# Altium PCB PCB1.PcbDoc
Units mil, origin at the board's own origin, x right, y up, seen from the top; angles counter-clockwise.
Board outline 2180 x 1597.53 mil, 2 copper layers (Top Layer, Bottom Layer); 11 components, 8 nets, 28 pads, 0 vias.
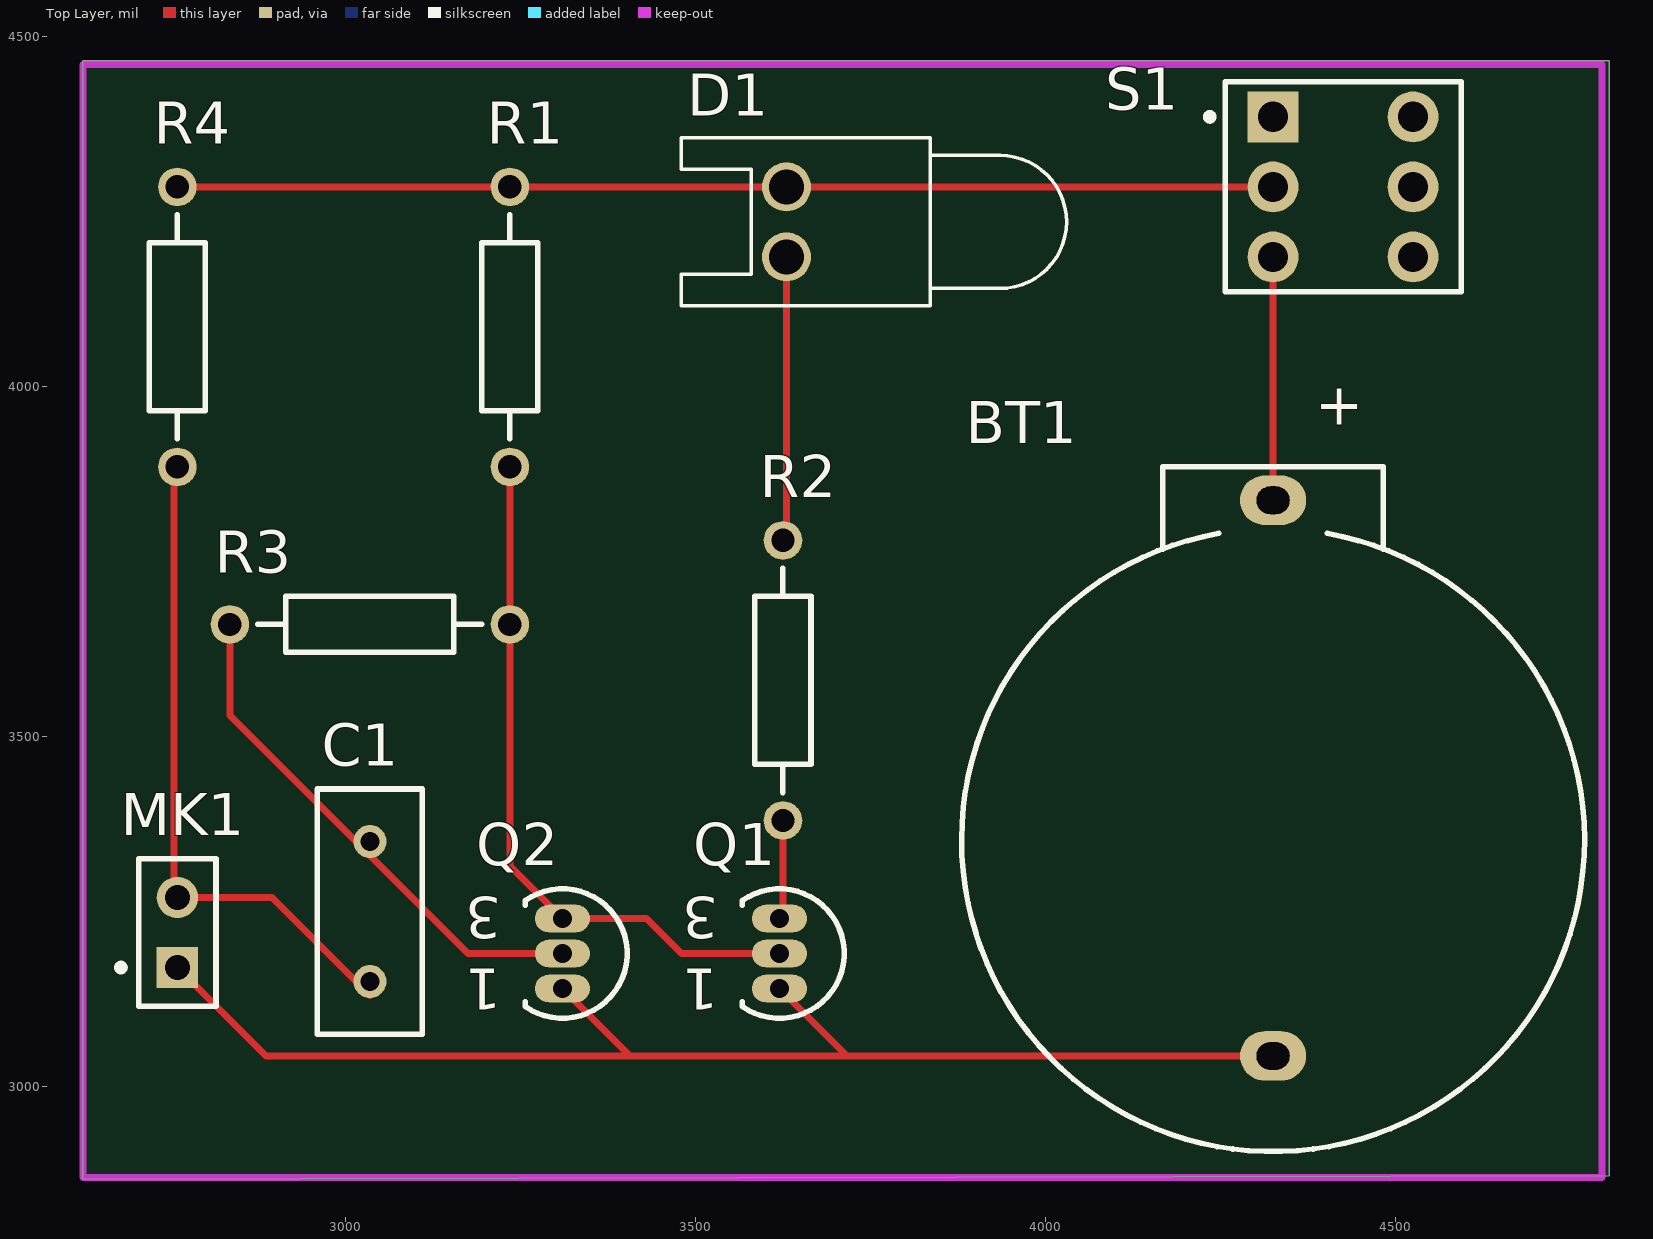
[diagram p0: Top Layer view]
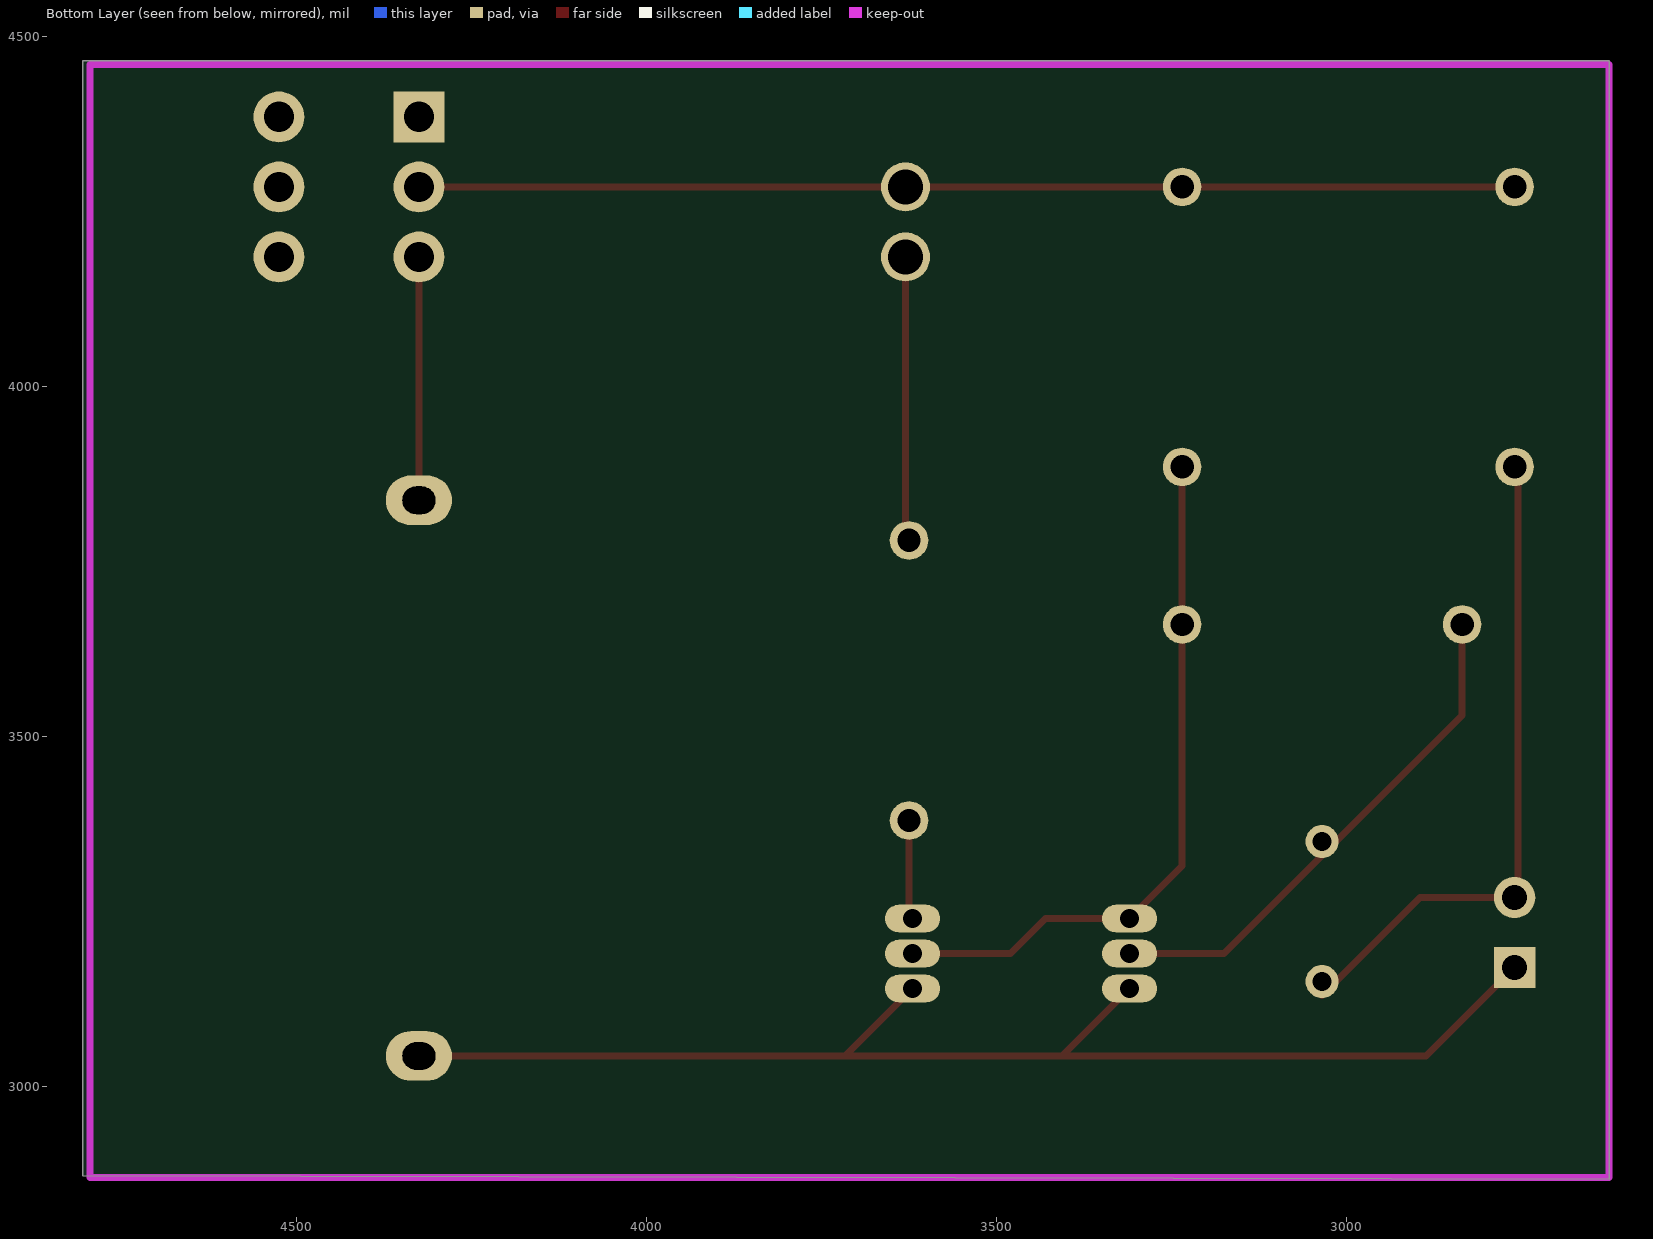
[diagram p1: Bottom Layer view, seen from below]

## Layer stack, top to bottom
Top Solder: solder mask 0.4, Solder Resist, Dk 3.5
Top Layer: signal copper 1.4
Dielectric 1: dielectric 12.6, FR-4, Dk 4.8
Bottom Layer: signal copper 1.4
Bottom Solder: solder mask 0.4, Solder Resist, Dk 3.5

## Board outline
4805,2872.51 4805,4465 2625,4465 2625,2867.47
cut-out: 2740,4725
cut-out: 2815,4825
cut-out: 4670,2615
cut-out: 4610,2550

## Design rules (kind name [scope] priority, off if disabled: settings)
Clearance [All] p1: gap=10 ignorepadtopadclearanceinfootprint=FALSE except(0: Arc-Hole Track-Hole SMDPad-Hole THPad-Hole Via-Hole Fill-Hole Poly-Hole Region-Hole Text-Hole)
PolygonConnect [All] p1: connectstyle=Relief reliefconductorwidth=10 reliefentries=4 polygonreliefangle="90 Angle" airgapwidth=10
RoutingVias [All] p1: holewidth=28 width=50 viastyle="Through Hole" minholewidth=28 minwidth=50 maxholewidth=28 maxwidth=50
SolderMaskExpansion [All] p1: expansion=4
Width [All] p1: maxlimit=10 minlimit=10 preferedwidth=10
30 further rules are at their usual default settings.

## Components (designator, comment, footprint, x,y, rotation, side; value= is the part's Value field where it differs from the comment)
BT1 "BAT3volt" BTH2032 4325,3350 r270 top
C1 "Cap" RAD-0.2 3035,3250 r90 top value=1uF
D1 "LED0" LED-0 3630,4235 r90 top
MK1 "Mic2" PIN2 2760,3170 r90 top
Q1 "8050" TO-92 3620,3190 r180 top
Q2 "8050" TO-92 3310,3190 r180 top
R1 "Res2" AXIAL-0.4 3235,4085 r90 top value=100k
R2 "Res2" AXIAL-0.4 3625,3580 r90 top value=100
R3 "Res2" AXIAL-0.4 3035,3660 r180 top value=100k
R4 "Res2" AXIAL-0.4 2760,4085 r90 top value=4.7k
S1 "SW-DPDT" DPDT-6 4425,4285 r0 top

## Footprints (in the part's own frame and the unit in brackets; to place one, negate y for a bottom-side part, rotate by r counter-clockwise, add the part's x,y. Pads: shape width x height; smd on the part's side, far side on the other; paste and mask are expansions set on the pad)
AXIAL-0.4 [mm] "Axial Device, Thru-Hole; 2 Leads; 0.4 in Pin Spacing"
  round 1.4 hole 0.85: 1(-5.08,0) 2(5.08,0)
  silkscreen extent -4.06,-1.02 4.06,1.02
BTH2032 [mm] "CR2032 BATTERY HOLDER"
  oval 1.8x2.4 hole 1 slot 1.2 at 90 deg: 1(-12.38,0) 2(7.78,0)
  silkscreen extent -13.6,-11.3 11.25,11.3, body extent -13.45,-11 11.05,11, height 8.5
DPDT-6 [mm] "Switch; 6 Leads"
  rect 1.85x1.85 hole 1.1: 1(-2.54,2.54)
  round 1.85 hole 1.1: 2(-2.54,0) 3(-2.54,-2.54) 4(2.54,-2.54) 5(2.54,0) 6(2.54,2.54)
  silkscreen extent -4.96,-3.81 4.28,3.81
LED-0 [mil] "LED; 2 Leads"
  round 70 hole 50: 1(50,0) 2(-50,0)
  silkscreen extent -120,-400 120,150
PIN2 [mm] "Photosensitive Diode; 2 Leads"
  rect 1.5x1.5 hole 0.9: 1(0,0)
  round 1.5 hole 0.9: 2(2.54,0)
  silkscreen extent -1.4,-1.4 3.94,2.17
RAD-0.2 [mm] "Radial Cap, Thru-Hole; 2 Leads; 0.2 in Pin Spacing"
  round 1.2 hole 0.7: 1(-2.54,0) 2(2.54,0)
  silkscreen extent -4.44,-1.91 4.44,1.91
TO-92 [mm] "TO, Flat Index; 3 In-Line, Axial Leads; Body Dia. 4.6mm; Leads 0.41 x 0.39 mm (max)"
  oval 2x1 hole 0.7: 1(0,1.27) 2(0,0) 3(0,-1.27)
  silkscreen extent -2.34,-2.34 1.35,2.34

## Part data
BT1: library part BATH_CR2032, "BATTERY HOLDER, CR2032", .=http://www.chila.ir, MANF_P#=-
C1: "Capacitor", LatestRevisionDate=17-Jul-2002, LatestRevisionNote="Re-released for DXP Platform.", PackageDescription="Radial Cap, Thru-Hole; 2 Leads; 0.3 in Pin Spacing", PackageReference=RAD-0.3, Published=8-Jun-2000, Publisher="Altium Limited"
D1: "Typical INFRARED GaAs LED", LatestRevisionDate=08-Jul-2005, LatestRevisionNote="Mech Layer 1 removed.", PackageDescription="LED; 2 Leads", PackageReference=LED-0, Published=8-Jun-2000, Publisher="Altium Limited"
MK1: "Microphone", LatestRevisionDate=17-Jul-2002, LatestRevisionNote="Re-released for DXP Platform.", PackageReference=PIN2, Published=24-Mar-1999, Publisher="Altium Limited"
Q1 Q2: library part 2N3904, "NPN General Purpose Amplifier", ComponentLink1Description="Manufacturer Link", ComponentLink1URL=http://www.fairchildsemi.com/, ComponentLink2Description=Datasheet, ComponentLink2URL=http://www.fairchildsemi.com/ds/2N%2F2N3904.pdf, DatasheetVersion=1997, LatestRevisionDate=15-Jan-2003, LatestRevisionNote="PCB Footprint 'BCY-W3/D4.7' replaced", PackageDescription="TO, Flat Index; 3 In-Line, Axial Leads; Body Dia. 4.5mm; Leads 0.51 x 0.48 mm (max)", PackageReference=TO-92A, PackageVersion=Sep-1998, Published=8-Jun-2000, Publisher="Altium Limited"
R1 R2 R3 R4: "Resistor", LatestRevisionDate=17-Jul-2002, LatestRevisionNote="Re-released for DXP Platform.", PackageDescription="Axial Device, Thru-Hole; 2 Leads; 0.4 in Pin Spacing", PackageReference=AXIAL-0.4, Published=8-Jun-2000, Publisher="Altium Limited"
S1: "Double-Pole, Double-Throw Switch", LatestRevisionDate=17-Jul-2002, LatestRevisionNote="Re-released for DXP Platform.", PackageDescription="Switch; 6 Leads", PackageReference=DPDT-6, Published=24-Mar-1999, Publisher="Altium Limited"

## Nets (pads, with @x,y where several pads share a name; then routed paths per layer and width w, separated by ;. In a path a pad name is that pad's centre, name@x,y a point inside that pad or via, vN(x,y) a via of type N, cw(c..) or ccw(c..) an arc to the next point about the centre after c; other vN are vias at no path point)
NetBT1_1: BT1.1 S1.3 | length 347.6
  Top Layer w10: BT1.1 S1.3
NetBT1_2: BT1.2 MK1.1 Q1.1 Q2.1 | length 1889.7
  Top Layer w10: MK1.1 2886.3,3043.7 3406.3,3043.7 ; Q2.1 3406.3,3043.7 ; Q1.1 3716.3,3043.7 ; BT1.2 3716.3,3043.7 ; 3406.3,3043.7 3716.3,3043.7
NetC1_1: C1.1 MK1.2 R4.1 | length 950.1
  Top Layer w10: R4.1@2755,3885 2755,3275 MK1.2 2895,3270 C1.1@3035,3130
NetC1_2: C1.2 Q2.2 R3.2 | length 745.8
  Top Layer w10: R3.2 2835,3530 3035,3330 3175,3190 Q2.2
NetD1_1: D1.1 R1.2 R4.2 S1.2 | length 1565
  Top Layer w10: R4.2 R1.2 D1.1 S1.2
NetD1_2: D1.2 R2.2 | length 407.1
  Top Layer w10: R2.2 3630,3785 D1.2
NetQ1_2: Q1.2 Q2.3 R1.1 R3.1 | length 1006.8
  Top Layer w10: R1.1 R3.1 3235,3315 Q2.3 3430,3240 3480,3190 Q1.2
NetQ1_3: Q1.3 R2.1 | length 142.1
  Top Layer w10: Q1.3 3625,3245 R2.1
pads on no net: S1.1 S1.4 S1.5 S1.6

## Keep-outs
Keep-Out Layer:
  lines w10: 2625,2870 2625,4460 2630,4460 4795,4460 4795,2870 2625,2870

## Silkscreen, mask and mechanical layers (free items; w line width, h text height)
Top Overlay:
  text "+" at 4385,3945 h60

## Text inside footprints (layer, text, board x,y; h text height)
Q1: Top Overlay "3" at 3532.44,3270.12 h59.05 r180; Top Overlay "1" at 3532.44,3167.95 h59.05 r180
Q2: Top Overlay "3" at 3222.44,3270.12 h59.05 r180; Top Overlay "1" at 3222.44,3167.95 h59.05 r180